# Altium PCB PCB1.PcbDoc
Units mm, origin at the board's own origin, x right, y up, seen from the top; angles counter-clockwise.
Board outline 152.4 x 101.6 mm, 2 copper layers (Top Layer, Bottom Layer); 12 components, 9 nets, 31 pads, 0 vias.
Unrouted connection lines stored in the file: 15.
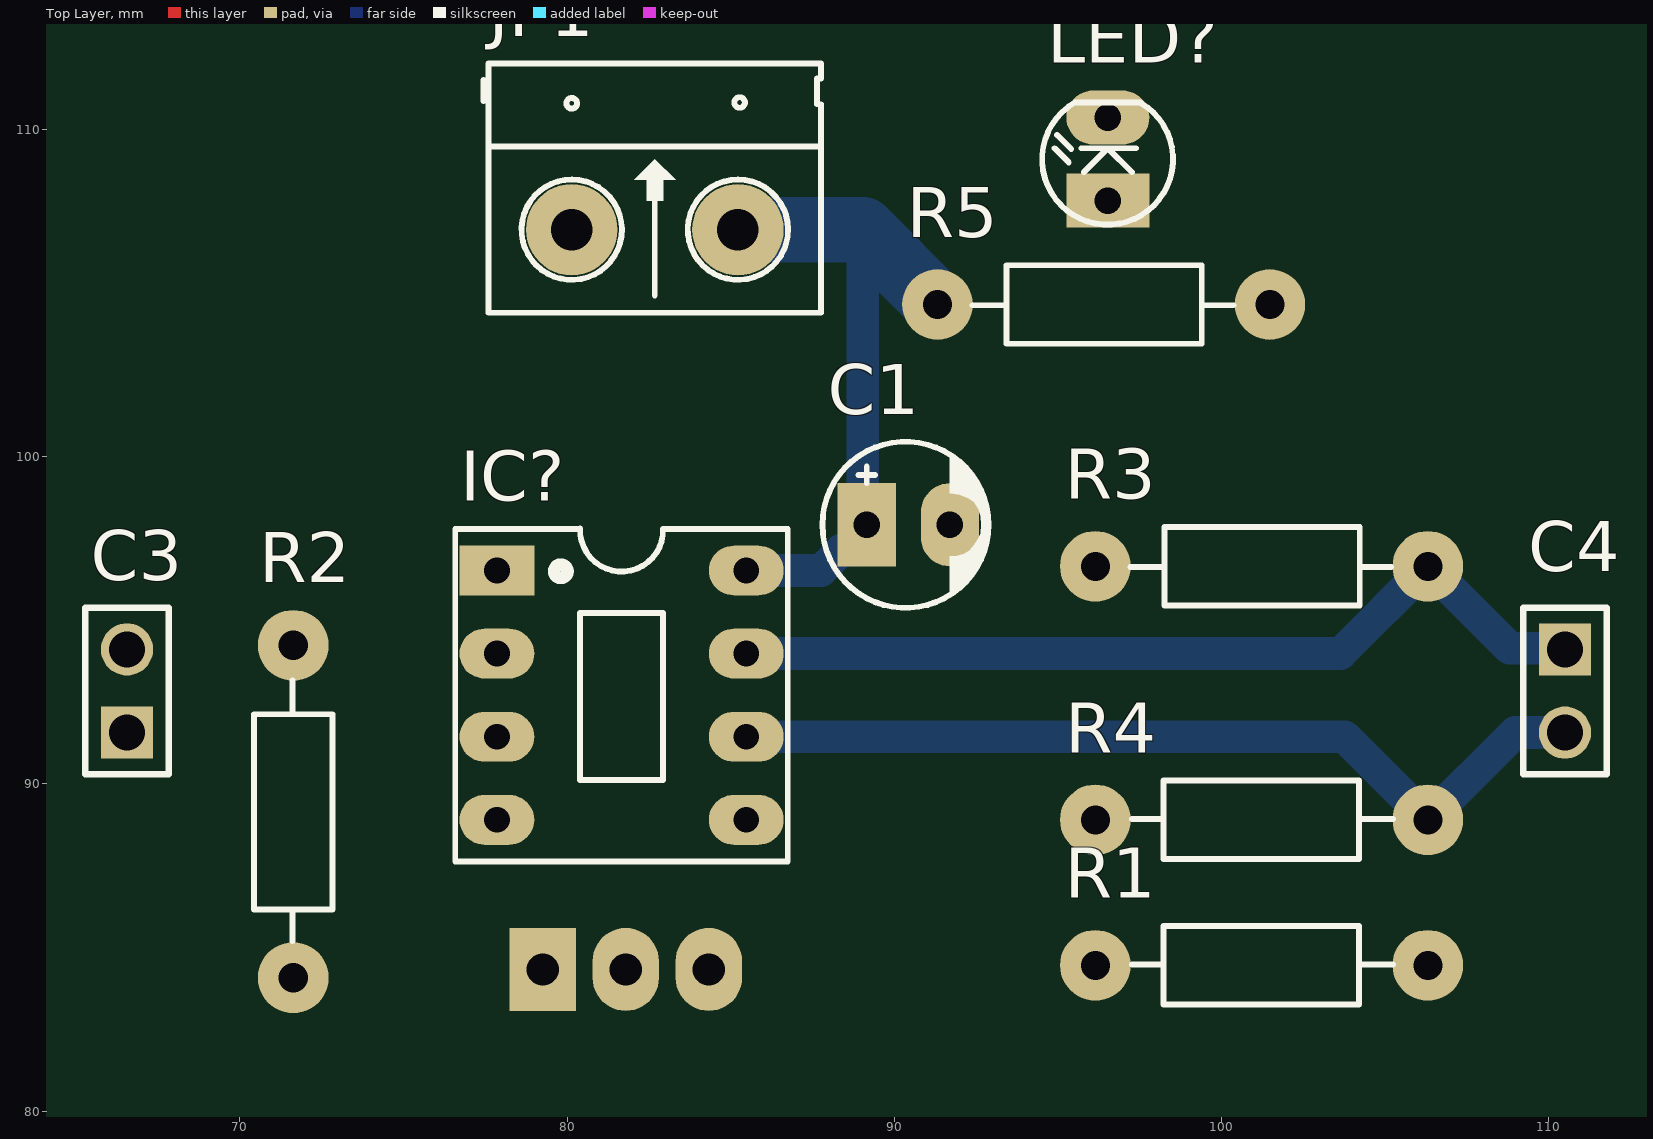
[diagram p0: Top Layer view]
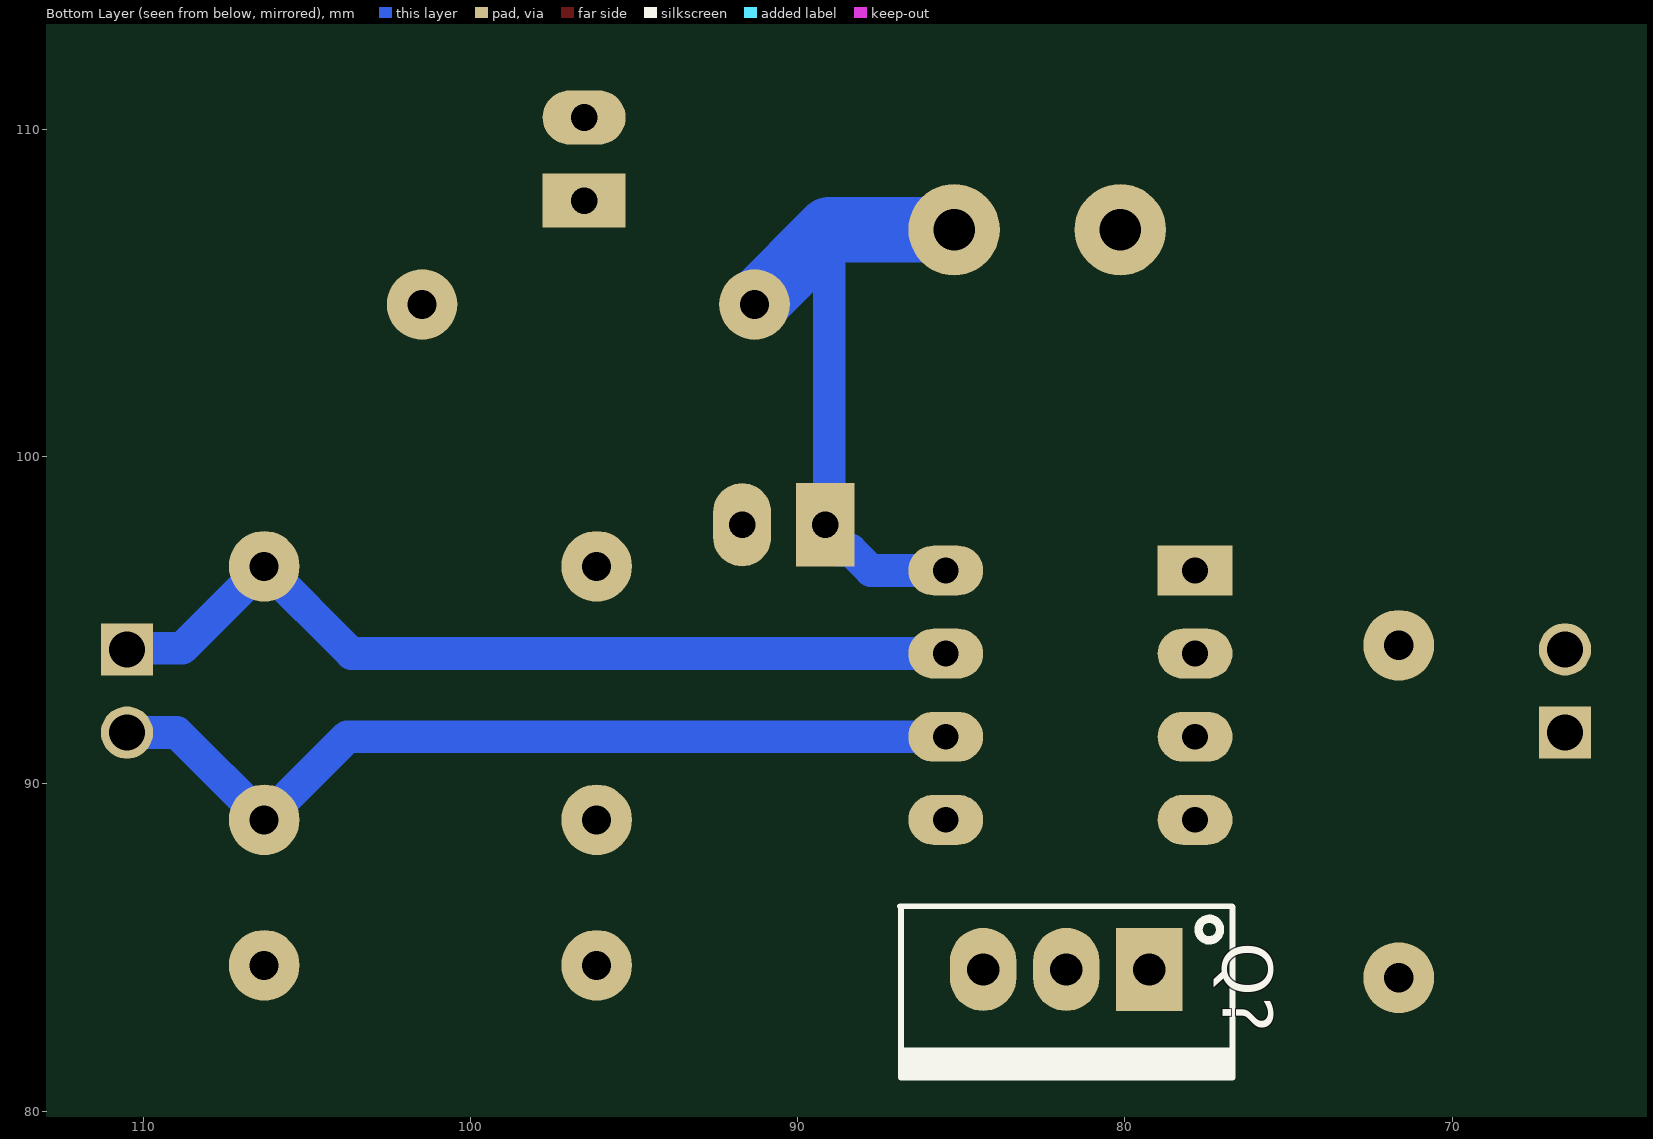
[diagram p1: Bottom Layer view, seen from below]

## Layer stack, top to bottom
Top Solder: solder mask 0.0102, Solder Resist, Dk 3.5
Top Layer: signal copper 0.0356
Dielectric 1: dielectric 0.32, FR-4, Dk 4.8
Bottom Layer: signal copper 0.0356
Bottom Solder: solder mask 0.0102, Solder Resist, Dk 3.5

## Board outline
25.4,25.4 177.8,25.4 177.8,127 25.4,127

## Design rules (kind name [scope] priority, off if disabled: settings)
Clearance [All] p1: gap=0.254 ignorepadtopadclearanceinfootprint=FALSE except(0: Arc-Hole Track-Hole SMDPad-Hole THPad-Hole Via-Hole Fill-Hole Poly-Hole Region-Hole Text-Hole)
PolygonConnect [All] p1: connectstyle=Relief reliefconductorwidth=0.254 reliefentries=4 polygonreliefangle="90 Angle" airgapwidth=0.254
RoutingVias [All] p1: holewidth=0.711 width=1.27 viastyle="Through Hole" minholewidth=0.711 minwidth=1.27 maxholewidth=0.711 maxwidth=1.27
SolderMaskExpansion [All] p1: expansion=0.102
Width [All] p1: maxlimit=2 minlimit=0.254 preferedwidth=1 toplayer_maxwidth=0.254 toplayer_prefwidth=0.254 bottomlayer_minwidth=0.5 minimp=50.000000 maximp=50.000000 favimp=50.000000
30 further rules are at their usual default settings.

## Components (designator, comment, footprint, x,y, rotation, side; value= is the part's Value field where it differs from the comment)
C1 "22uF" CP1/2 89.154,97.917 r0 top value=10uF/50V
C3 "JP2" JP2-D1T 66.548,91.567 r90 top
C4 "JP2" JP2-D1T 110.49,94.107 r270 top
IC? "MAX485" DIP8/W0.3 77.851,96.52 r270 top
JP1 "Header 2_1" HED2 80.137,106.934 r0 top value="Header 2"
LED? "LED" LED-3 96.52,107.823 r90 top value="LED 3 ly Single Colour"
Q? "IRF840" QTO-220 79.248,84.328 r0 bottom
R1 "10k" RES-1/4W 100.838,84.582 r180 top
R2 "4.7K" RES-1/4W 71.501,88.773 r270 top
R3 "10K" RES-1/4W 101.6,96.52 r0 top
R4 "10K" RES-1/4W 100.838,89.027 r180 top
R5 "220" RES-1/4W 96.774,104.521 r0 top

## Footprints (in the part's own frame and the unit in brackets; to place one, negate y for a bottom-side part, rotate by r counter-clockwise, add the part's x,y. Pads: shape width x height; smd on the part's side, far side on the other; paste and mask are expansions set on the pad)
CP1/2 [mil] "Tu hoa < 22uF/16>50V"
  rect 70x100 hole 32: 1(0,0)
  oval 70x100 hole 32: 2(100,0)
  silkscreen extent -53,-100 147,100, body extent -49,-99 149,99, height 287
DIP8/W0.3 [mil] "8 PIN, W 300mil, Pin to pin 100mil"
  rect 60x90 hole 31: 1(0,0)
  oval 60x90 hole 31: 2(100,0) 3(200,0) 4(300,0) 5(300,300) 6(200,300) 7(100,300) 8(0,300)
  silkscreen extent -50,-50 350,350, body extent -50,-40 350,336, height 201
HED2 [mil] "Header 2, 2 pin, hight 300mil, Pin to Pin 200, Colour Green"
  round 110 hole 50: 1(0,0) 2(200,0)
  silkscreen extent -106,-100 300,200, body extent -92,-140 302,155, height 394
JP2-D1T [mm] "2 pins, 1 row, straight, gold plating"
  rect 1.6x1.6 hole 1.1: 1(0,0)
  round 1.6 hole 1.1: 2(2.54,0)
  silkscreen extent -1.27,-1.27 3.81,1.27, body extent -1.27,-1.27 3.81,1.27, height 8.54
LED-3 [mil] "LED 2 PIN, 3ly Only colour"
  rect 65x100 hole 32: 1(0,0)
  oval 65x100 hole 32: 2(100,0)
  silkscreen extent -29,-78 118,79, body extent -25,-75 113,75, height 217
QTO-220 [mil] "TO-220 - 1-2-3"
  rect 80x100 hole 39: 1(0,0)
  oval 80x100 hole 39: 2(100,0) 3(200,0)
  silkscreen extent -100,-76 300,130, body extent -119,-64 322,121, height 755
RES-1/4W [mil]
  round 85 hole 35: 1(-215,5) 2(185,5)
  silkscreen extent -173,-42 141,52, body extent -227,-42 197,52, height 95

## Part data
C1: library part CP1, "Cap P  0,1uF < 22uF , 16 - 50V", Description 1="10 => 220uF/6,3V/10V - 10uF => 100uF/16V", Description 2="0,1uF => 33uF/50V - 10uF => 22uF/63V", Description 3="0,47uF => 10uF/100V"
C3 C4: "WR-PHD 2.54 mm Angled Socket Header", Manufacturer="Würth Elektronik eiSos GmbH", partNo=613002143121, ComponentLink1 Description=Manufacturer, ComponentLink1URL=http://www.we-online.com, ComponentLink2 Description=Datasheet, ComponentLink2URL=http://katalog.we-online.de/em/datasheet/6130xx143121.pdf, Created by="Karrer Zheng", Created Date="29 March 2013", NoPins=02
IC?: "RS232 - RS485 (Same sn75176)"
JP1: "Header, 2-Pin", Manufacturer="Generic Components", Class=Connector
LED?: "LED Single colour Green and Red"
Q?: "MOSFET N - CHANNEL 500V - 0.75 - 8A - TO-220"
R1 R2 R3 R4 R5: library part Res, "Res", Manufacturer="Generic Components", Class=Passive, Published=08/06/2000, Publisher="Altium Hobart Technology Centre", SubClass=R

## Nets (pads, with @x,y where several pads share a name; then routed paths per layer and width w, separated by ;. In a path a pad name is that pad's centre, name@x,y a point inside that pad or via, vN(x,y) a via of type N, cw(c..) or ccw(c..) an arc to the next point about the centre after c; other vN are vias at no path point)
GND: C1.2 IC?.5 JP1.1 LED?.2 Q?.3 R3.1
NetC4_1: C4.1 IC?.7 R3.2 | length 27.2
  Bottom Layer w1: IC?.7 103.632,93.98 R3.2 108.804,94.142 110.455,94.142 C4.1
NetC4_2: C4.2 IC?.6 R4.1 | length 27.2
  Bottom Layer w1: IC?.6 103.759,91.44 R4.1 108.966,91.567 C4.2
NetIC?_2: IC?.2 IC?.3 Q?.2 R1.2
NetLED?_1: LED?.1 R5.2
NetQ?_1: Q?.1 R2.2
RX: C3.2 IC?.1
TX: C3.1 IC?.4 R2.1
VCC: C1.1 IC?.8 JP1.2 R1.1 R4.2 R5.1 | length 20.6
  Bottom Layer w1: IC?.8 87.757,96.52 88.384,97.147 88.765,97.147 89.154,97.536 C1.1 C1.1@89.281,98.044 ; C1.1@89.027,98.044 89.027,106.934
  Bottom Layer w2: JP1.2 89.027,106.934 R5.1